# Altium PCB Coil_only_PCB1.PcbDoc
Units mm, origin at the board's own origin, x right, y up, seen from the top; angles counter-clockwise.
Board outline 57.7 x 52.7 mm, 4 copper layers (Top Layer, Mid-Layer 1, Mid-Layer 2, Bottom Layer), stack 1.341 mm thick; 4 components, 31 nets, 13 pads, 4 vias.
Unrouted connection lines stored in the file: 1.
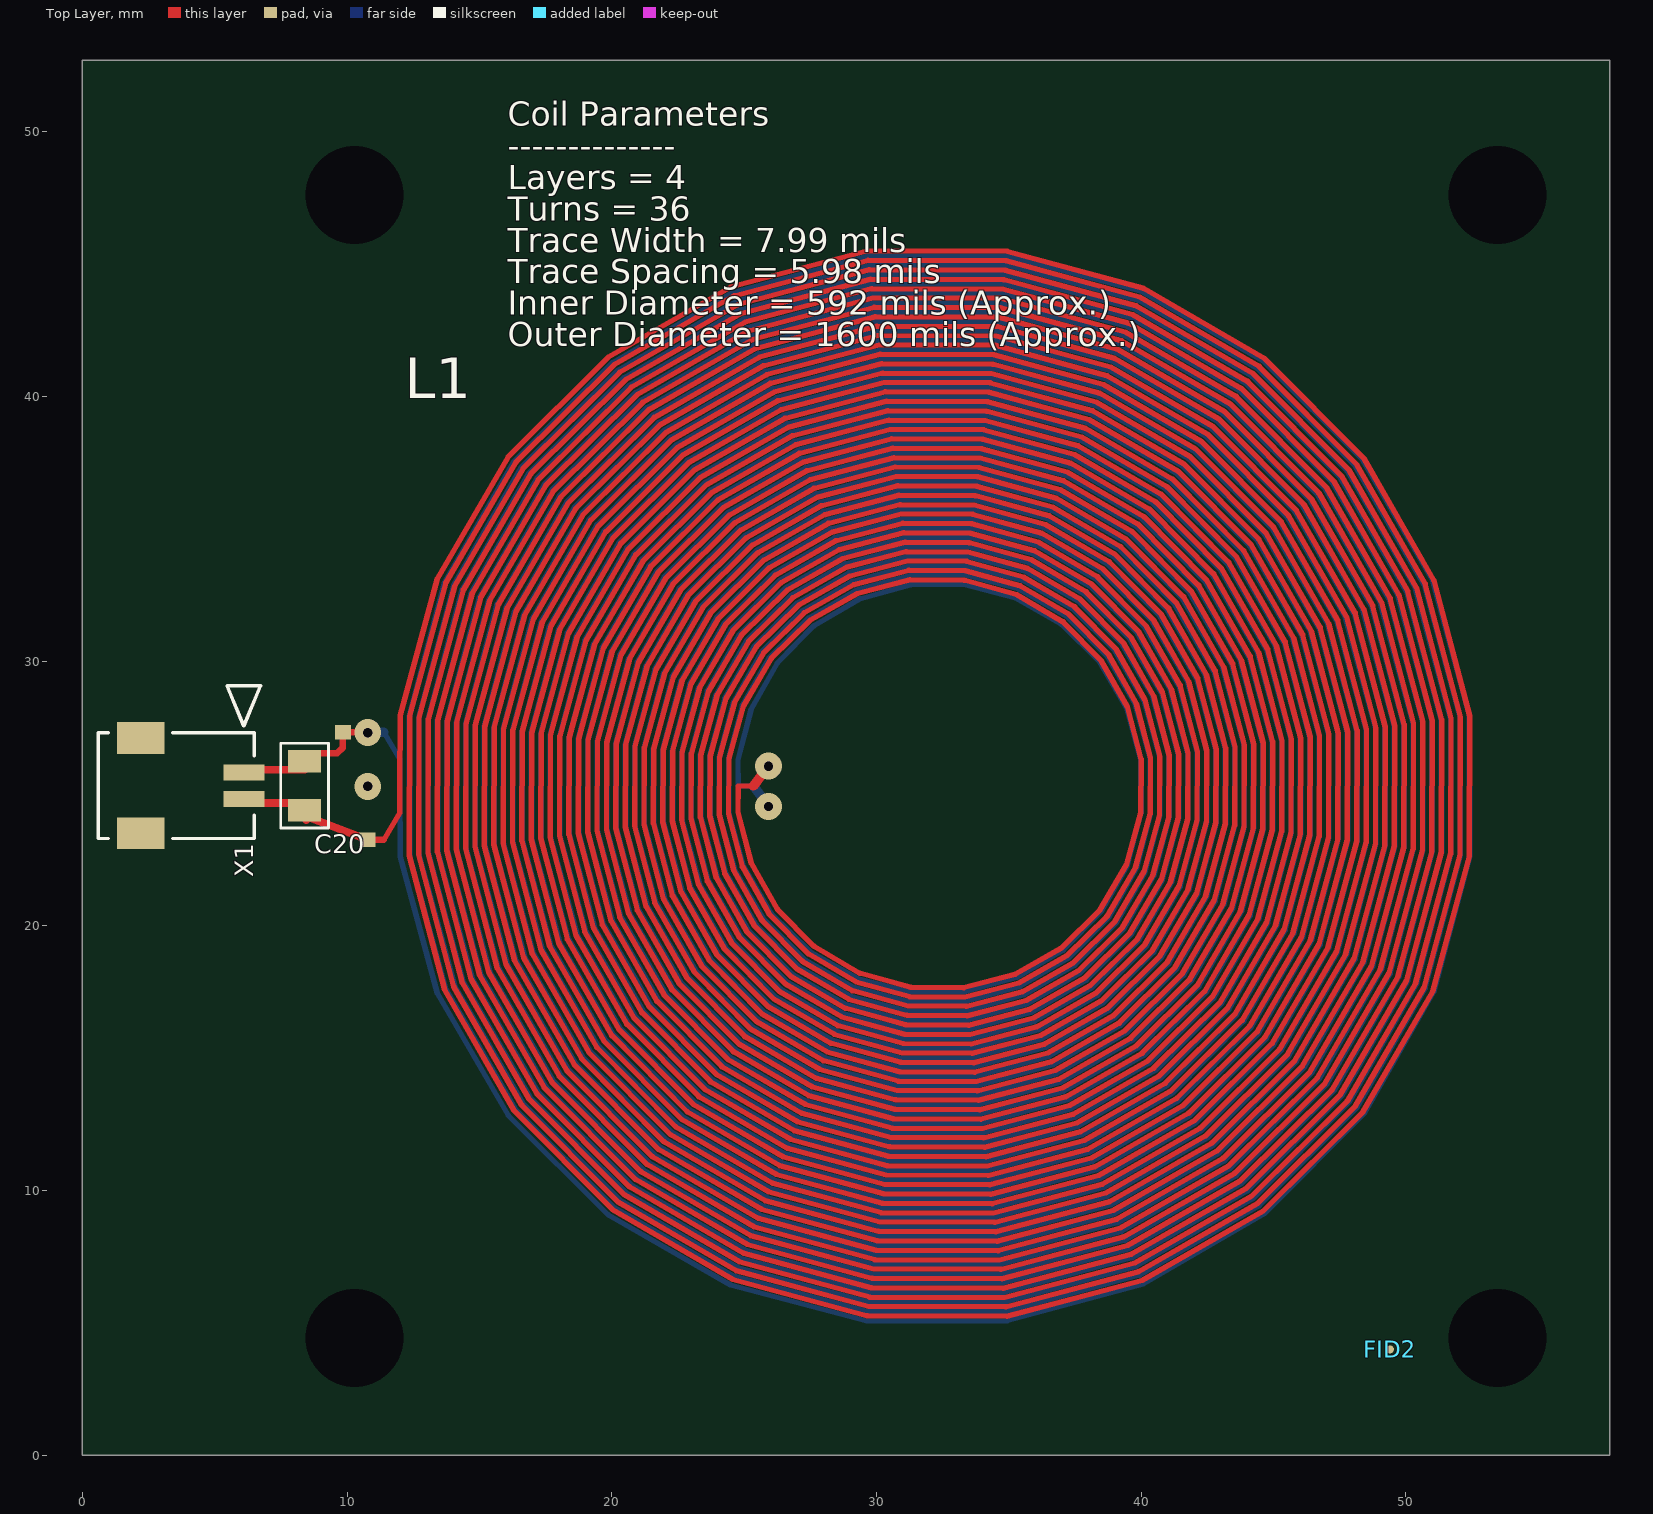
[diagram p0: Top Layer view]
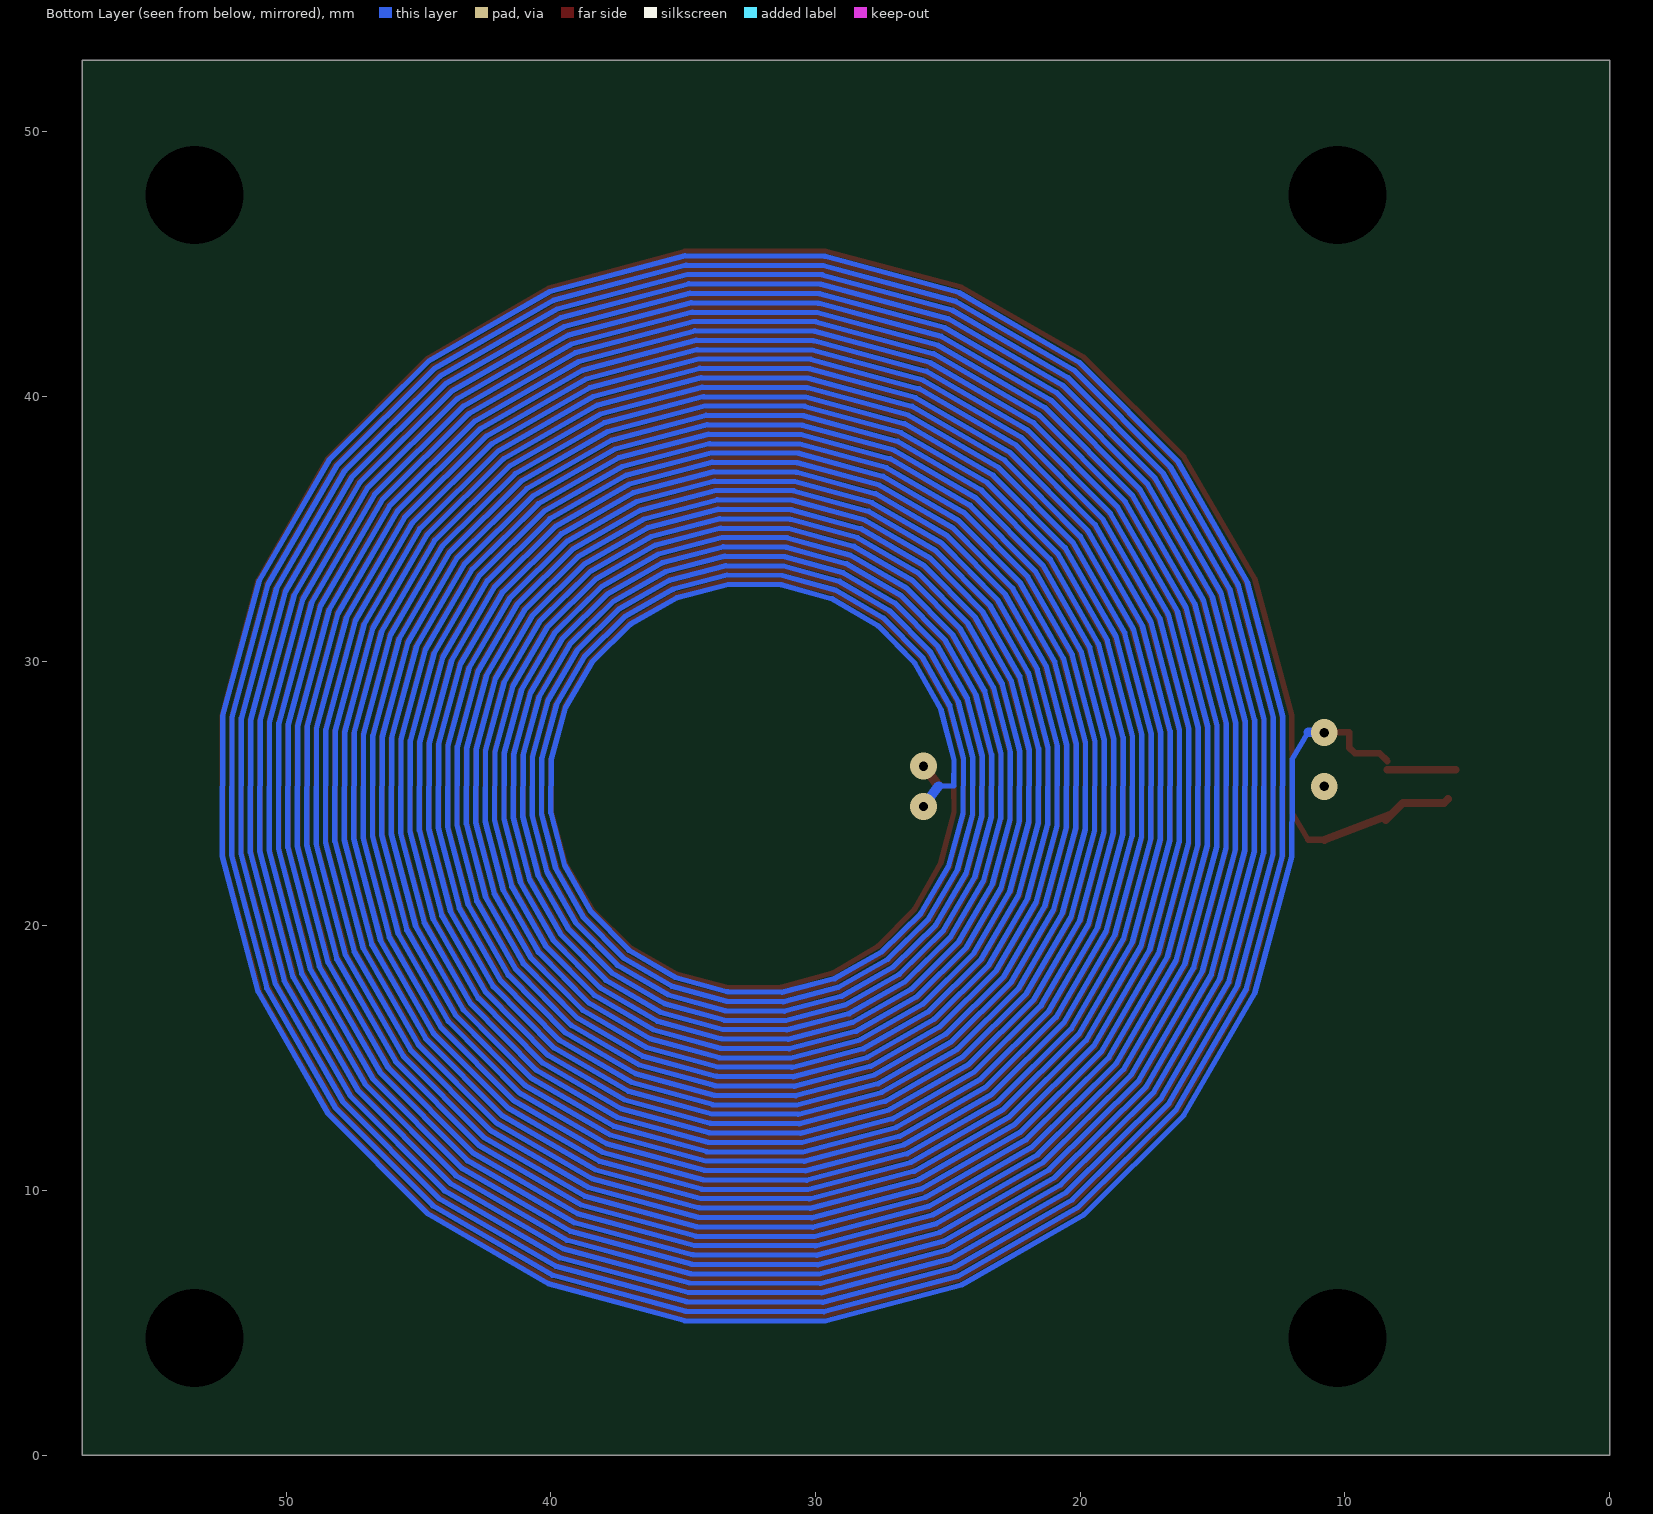
[diagram p1: Bottom Layer view, seen from below]
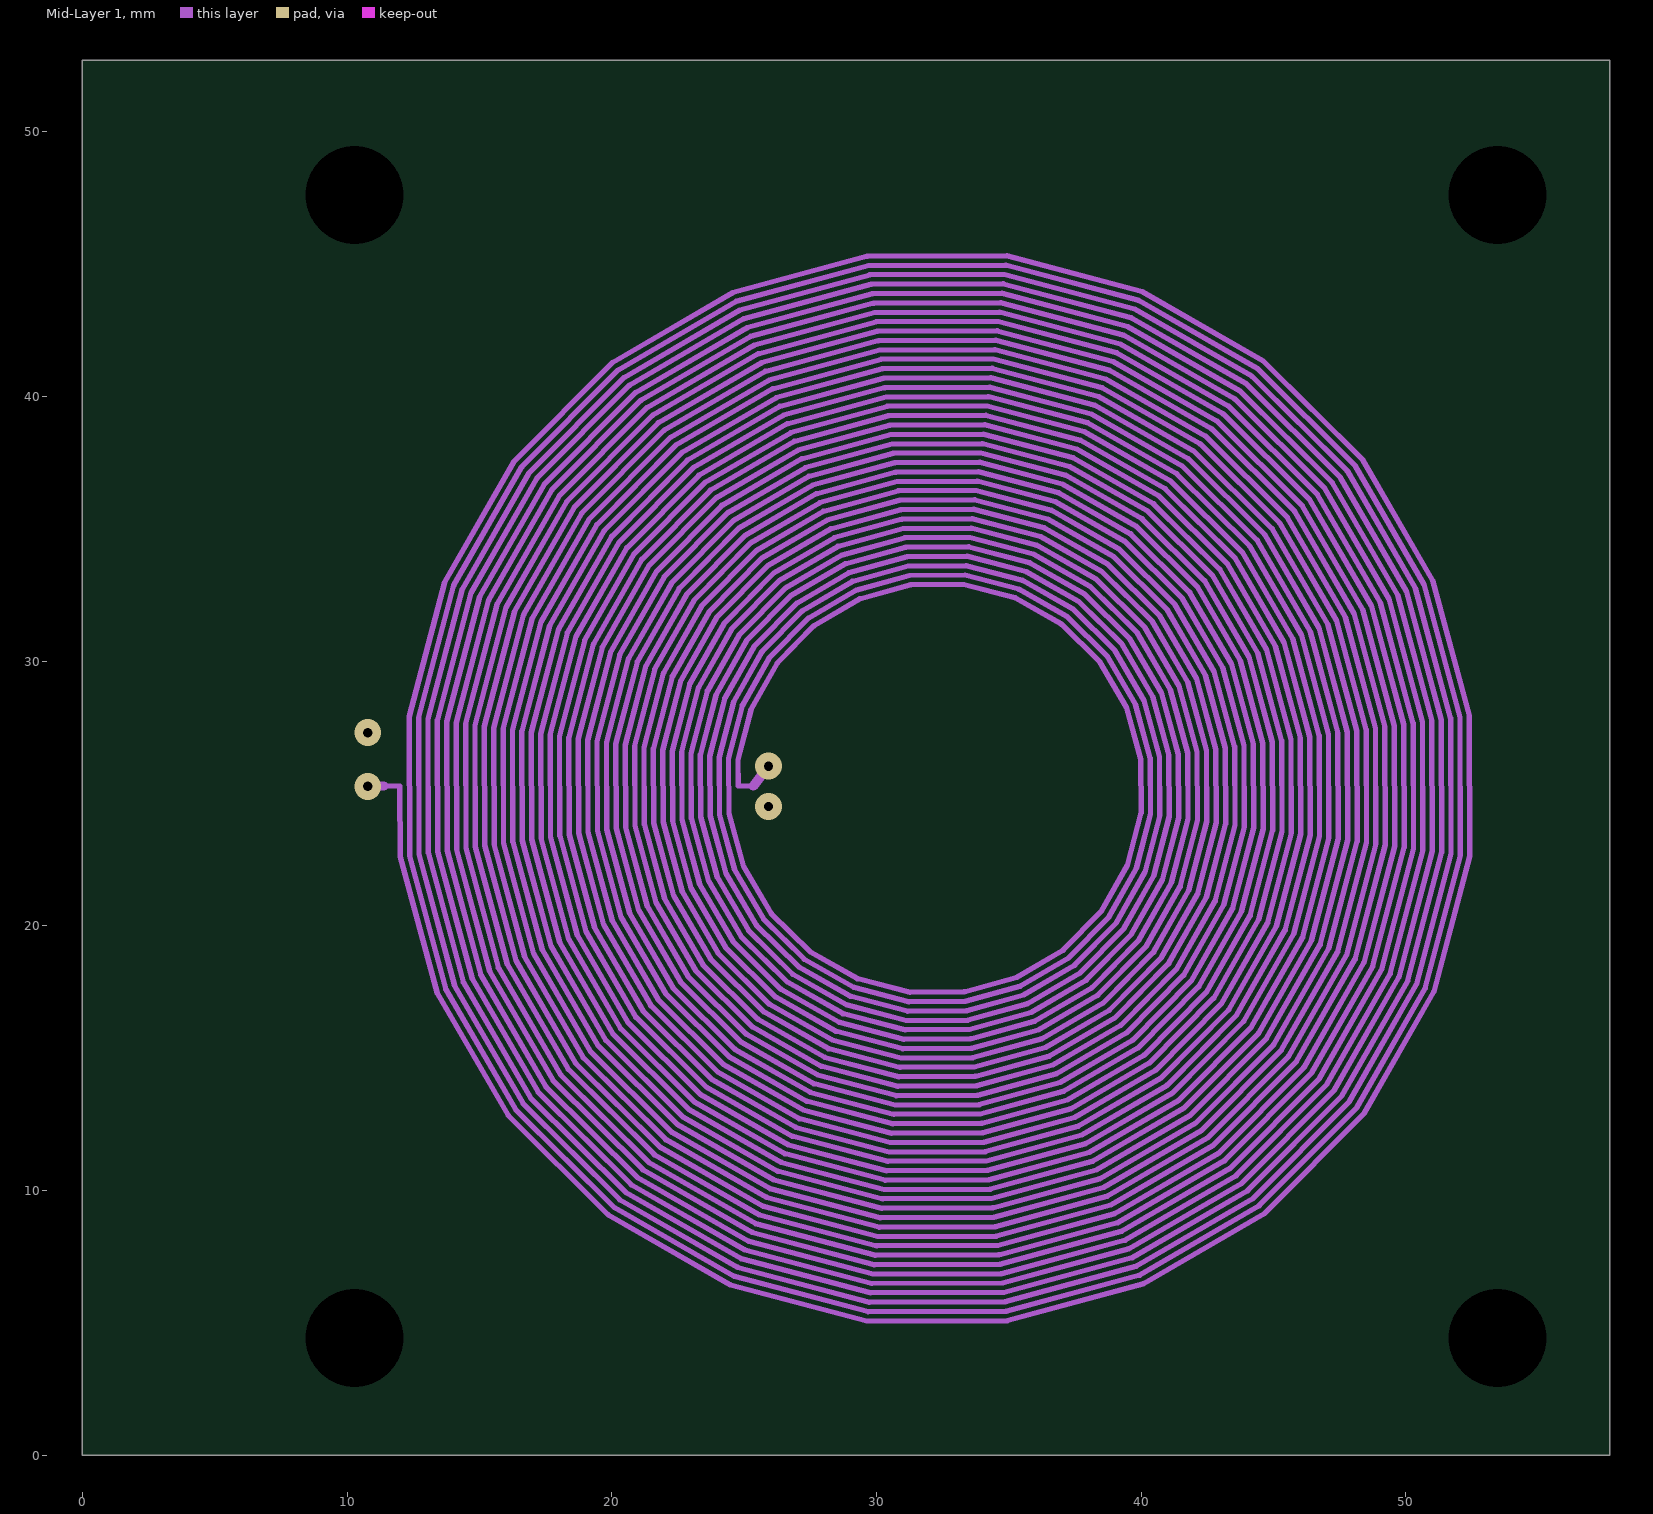
[diagram p2: Mid-Layer 1]
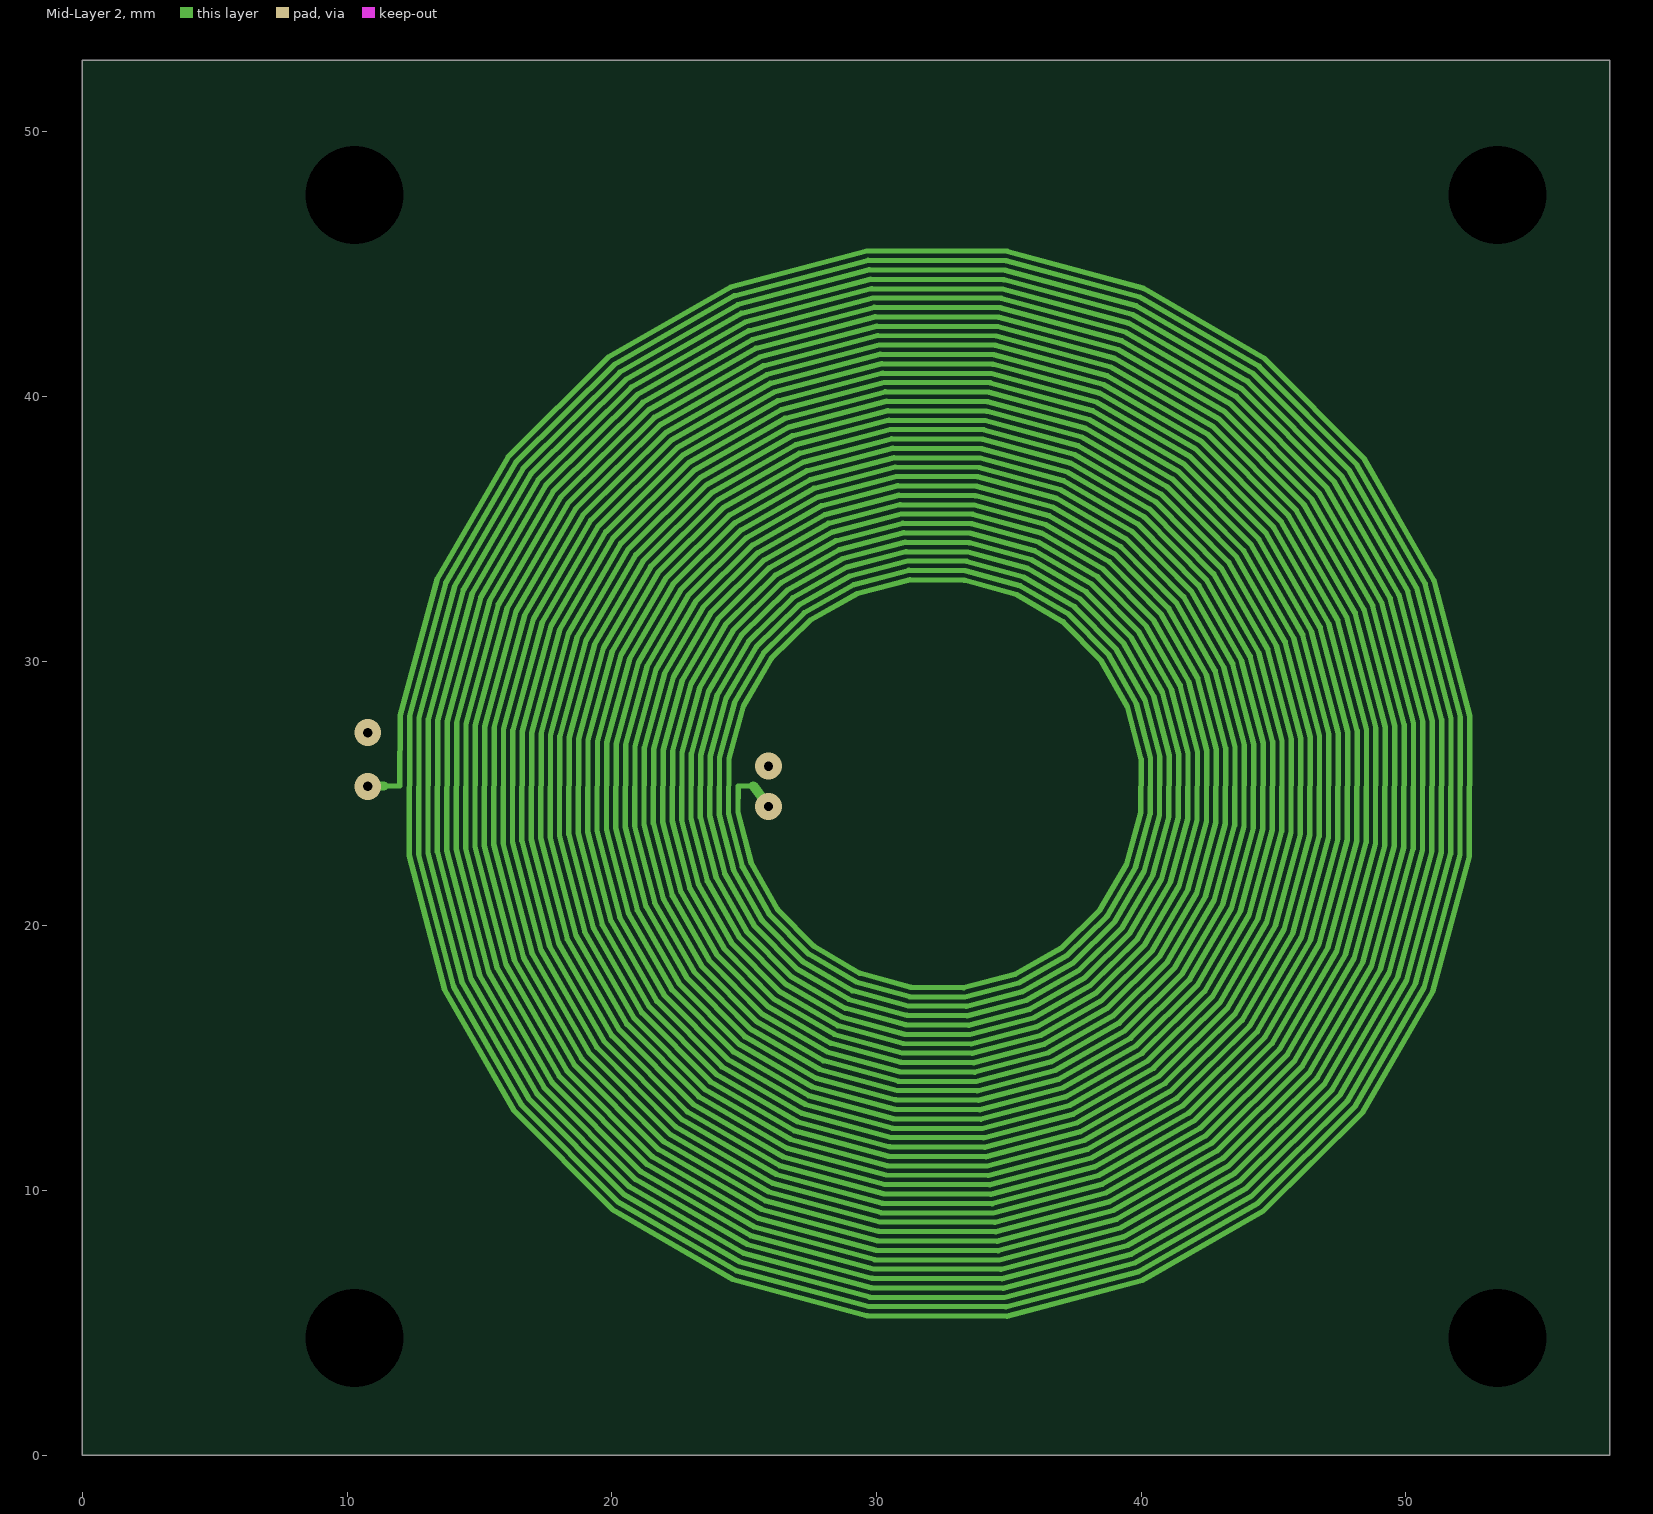
[diagram p3: Mid-Layer 2]

## Layer stack, top to bottom
Top Solder: solder mask 0.0102, Solder Resist, Dk 3.5
Top Layer: signal copper 0.035
Dielectric 1: dielectric 0.4, FR-4, Dk 4.8
Mid-Layer 1: signal copper 0.0356
Dielectric3: dielectric 0.4, FR-4, Dk 4.8
Mid-Layer 2: signal copper 0.0356
Dielectric2: dielectric 0.4, FR-4, Dk 4.8
Bottom Layer: signal copper 0.035
Bottom Solder: solder mask 0.0102, Solder Resist, Dk 3.5

## Board outline
0,0 57.7,0 57.7,52.7 0,52.7

## Design rules (kind name [scope] priority, off if disabled: settings)
BoardOutlineClearance [All] p1: gap=0.254 ignorepadtopadclearanceinfootprint=FALSE except(0: Arc-SplitContinuation Track-SplitContinuation SMDPad-SplitContinuation THPad-SplitContinuation Via-SplitContinuation Fill-SplitContinuation Poly-SplitContinuation Region-SplitContinuation Text-SplitContinuation; 0.4: Arc-OutlineEdge Track-OutlineEdge SMDPad-OutlineEdge THPad-OutlineEdge Via-OutlineEdge Fill-OutlineEdge Poly-OutlineEdge Region-OutlineEdge Text-OutlineEdge)
Clearance keepout [IsKeepOut] p1: gap=0 ignorepadtopadclearanceinfootprint=TRUE
Clearance [All] p2: gap=0.254 ignorepadtopadclearanceinfootprint=TRUE except(0: Arc-Fill Track-Fill SMDPad-Fill THPad-Fill Via-Fill Fill-Fill Text-Hole; 0.1: Arc-Track Track-Track; 0.127: Arc-Arc SMDPad-SMDPad; 0.2: Arc-SMDPad Track-SMDPad; 0.33: Arc-THPad Track-THPad SMDPad-THPad; 0.5: Arc-Hole Track-Hole THPad-THPad THPad-Hole Via-Hole)
HoleSize [All] p1: absolutevalues=TRUE maxlimit=5 minlimit=0.2 maxpercent=80.000 minpercent=20.000
MinimumAnnularRing [All] p1: minimumring=0.13
MinimumSolderMaskSliver [All] p1: minsoldermaskwidth=0.127
PolygonConnect [All] p1: connectstyle=Relief reliefconductorwidth=0.254 reliefentries=4 polygonreliefangle="90 Angle" airgapwidth=0.254
RoutingVias [All] p1: holewidth=0.3 width=0.7 viastyle="Through Hole" minholewidth=0.3 minwidth=0.7 maxholewidth=0.711 maxwidth=1.27
SilkToSilkClearance [All] p1: silktosilkclearance=0.15
SilkToSolderMaskClearance [IsPad] p1: minsilkscreentomaskgap=0.15 clearancetoexposedcopper=FALSE
SolderMaskExpansion [All] p1: expansion=0.038 istentingtop=FALSE
UnRoutedNet [All] p1: checkbadconnections=TRUE
Width [All] p1: maxlimit=10 minlimit=0.127 preferedwidth=0.3 bottomlayer_prefwidth=0.2 minimp=50.000000 maximp=50.000000 favimp=50.000000
25 further rules are at their usual default settings.

## Classes and differential pairs
component class Sheet1: FID2
component class Sense_LDC1612: C20 L1 X1

## Components (designator, comment, footprint, x,y, rotation, side; value= is the part's Value field where it differs from the comment)
C20 "510pF" CAP0805 8.4,25.3 r90 top value="510pF 50V"
FID2 "Fiducial" FID 49.4,4 r90 top
L1 "SenseCoil" COIL_4L 10.783,25.273 r0 top
X1 "2P Pico-Clasp" CON_2023960207 6.1,25.8 r270 top value=2023960207

## Footprints (in the part's own frame and the unit in brackets; to place one, negate y for a bottom-side part, rotate by r counter-clockwise, add the part's x,y. Pads: shape width x height; smd on the part's side, far side on the other; paste and mask are expansions set on the pad)
CAP0805 [mm]
  rect 0.85x1.25 smd: 1(-0.925,0) 2(0.925,0)
  silkscreen extent -1.6,-0.9 1.6,0.9, body extent -1,-0.63 1,0.63, height 1.35
COIL_4L [mil]
  rect 24x22 smd: 1(-0.34,-79.53) 2(-37.08,80.47)
  Top Layer drawing of 873 lines, arcs and shapes, not listed
  Mid-Layer 1 drawing of 869 lines, arcs and shapes, not listed
  Mid-Layer 2 drawing of 869 lines, arcs and shapes, not listed
  Bottom Layer drawing of 870 lines, arcs and shapes, not listed
CON_2023960207 [mm]
  rect 0.6x1.55 smd paste+0 mask+0.076: 1(0,0) 2(1,0)
  rect 1.2x1.8 smd paste+0 mask+0.076: 3(-1.3,-3.9) 4(2.3,-3.9)
  silkscreen extent -3.28,-5.5 2.5,0.63, body extent -1.5,-5.48 2.5,0.43, height 3.2
FID [mm]
  round 0.3 smd paste-1 mask+0.5: 2(0,0)

## Part data
C20: library part CC0805JRNPO9BN511, "0805 510 pF 50 V ±5 % Tolerance NP0 SMT Multilayer Ceramic Capacitor", Case Code (Imperial)=0805, Case Code (Metric)=2012, Dielectric=NP0, LCSC Part#=C309486, Manufacturer=Yageo, Max Operating Temperature=125°C, Min Operating Temperature=-55°C, Supplier Part Number=311-4240-1-ND, Tolerance=5%, Voltage Rating=50V, Case/Package=0805, Category="Ceramic Capacitors", ComponentLink1Description=http://www.mouser.com/ds/2/447/Yageo_UPY-GP_NP0_16V-to-50V_9-358835.pdf?src-supplier=Mouser, ComponentLink1URL=http://www.mouser.com/ds/2/447/Yageo_UPY-GP_NP0_16V-to-50V_9-358835.pdf?src-supplier=Mouser, ComponentLink2Description=https://www.yageo.com/upload/media/product/productsearch/datasheet/mlcc/UPY-GP_NP0_16V-to-50V_18.pdf?src-supplier=Digi-Key, ComponentLink2URL=https://www.yageo.com/upload/media/product/productsearch/datasheet/mlcc/UPY-GP_NP0_16V-to-50V_18.pdf?src-supplier=Digi-Key, ComponentLink3Description=http://www.yageo.com/documents/recent/UPY-GP_NP0_16V-to-50V_16.pdf?src-supplier=Digi-Key, ComponentLink3URL=http://www.yageo.com/documents/recent/UPY-GP_NP0_16V-to-50V_16.pdf?src-supplier=Digi-Key, ComponentLink4Description=http://www.yageo.com/exep/pages/download/literatures/ProductSelectionGuide%202014_Final_2.pdf?src-supplier=Digi-Key, ComponentLink4URL=http://www.yageo.com/exep/pages/download/literatures/ProductSelectionGuide%202014_Final_2.pdf?src-supplier=Digi-Key, ComponentLink5Description=http://www.yageo.com/documents/recent/UPY-GP_NP0_16V-to-50V_9.pdf?src-supplier=Future+Electronics, ComponentLink5URL=http://www.yageo.com/documents/recent/UPY-GP_NP0_16V-to-50V_9.pdf?src-supplier=Future+Electronics, ComponentLink6Description=https://datasheet.octopart.com/CC0805JRNPO9BN511-Yageo-datasheet-151948684.pdf?src-supplier=Newark, ComponentLink6URL=https://datasheet.octopart.com/CC0805JRNPO9BN511-Yageo-datasheet-151948684.pdf?src-supplier=Newark, Lead Free="Lead Free", Length=0.079inch, Manufacturer Part Number=CC0805JRNPO9BN511, Mounting Technology="Surface Mount", Packaging="Tape and Reel", Pricing="1=0.18, 10=0.119, 50=0.071, 100=0.0559, 500=0.04124, 1000=0.03415 (USD)", RoHS=Yes, Series=CC, Stock=4065, Supplier=Digi-Key, Termination=SMD/SMT, Thickness=0.028inch, Voltage Rating (DC)=50V, Weight=0.000194oz, Width=0.049inch
X1: library part 202396-0207, "Conn Shrouded Header (4 Sides) HDR 2 POS 1mm Solder RA Side Entry SMD Pico-Clasp™ T/R", Flammability Rating="UL94 V-0", Insulation Color=Natural, LCSC Part#=C585325, Manufacturer=Molex, Max Operating Temperature=105°C, Min Operating Temperature=-40°C, Supplier Part Number=WM26783CT-ND, Category="Headers and Wire Housings", ComponentLink1Description=http://datasheet.octopart.com/2023960207-Molex-datasheet-147952241.pdf?src-supplier=Digi-Key, ComponentLink1URL=http://datasheet.octopart.com/2023960207-Molex-datasheet-147952241.pdf?src-supplier=Digi-Key, ComponentLink2Description=https://www.molex.com/pdm_docs/sd/2023960207_sd.pdf?src-supplier=Digi-Key, ComponentLink2URL=https://www.molex.com/pdm_docs/sd/2023960207_sd.pdf?src-supplier=Digi-Key, ComponentLink3Description=http://datasheet.octopart.com/2023960207-Molex-datasheet-147952241.pdf?src-supplier=Newark, ComponentLink3URL=http://datasheet.octopart.com/2023960207-Molex-datasheet-147952241.pdf?src-supplier=Newark, ComponentLink4Description=http://datasheet.octopart.com/2023960207-Molex-datasheet-147952241.pdf?src-supplier=Farnell, ComponentLink4URL=http://datasheet.octopart.com/2023960207-Molex-datasheet-147952241.pdf?src-supplier=Farnell, ComponentLink5Description=http://datasheet.octopart.com/2023960207-Molex-datasheet-147952241.pdf?src-supplier=Avnet, ComponentLink5URL=http://datasheet.octopart.com/2023960207-Molex-datasheet-147952241.pdf?src-supplier=Avnet, ComponentLink6Description=http://datasheet.octopart.com/2023960207-Molex-datasheet-147952241.pdf?src-supplier=Arrow+Electronics, ComponentLink6URL=http://datasheet.octopart.com/2023960207-Molex-datasheet-147952241.pdf?src-supplier=Arrow+Electronics, ComponentLink7Description=http://datasheet.octopart.com/2023960207-Molex-datasheet-147952241.pdf?src-supplier=TTI, ComponentLink7URL=http://datasheet.octopart.com/2023960207-Molex-datasheet-147952241.pdf?src-supplier=TTI, ComponentLink8Description=http://datasheet.octopart.com/2023960207-Molex-datasheet-147952241.pdf?src-supplier=Electro+Sonic, ComponentLink8URL=http://datasheet.octopart.com/2023960207-Molex-datasheet-147952241.pdf?src-supplier=Electro+Sonic, ComponentLink9Description=https://datasheet.octopart.com/202396-0207-Molex-datasheet-134623761.pdf?src-supplier=TME, ComponentLink9URL=https://datasheet.octopart.com/202396-0207-Molex-datasheet-134623761.pdf?src-supplier=TME, Connector Type=Header, Contact Finish - Mating=GOLD, Contact Material=Bronze, Contact Shape=Square, Contact Type="Male Pin", Fastening Type=Latch, Insulation Material=Nylon, Manufacturer Part Number=202396-0207, Mounting Technology="Surface Mount", Number of Positions=2, Number of Rows=1, Packaging="Tape and Reel", Pricing="1=0.97, 10=0.804, 100=0.6698 (USD)", RoHS=No, Series="Pico-Clasp 202396", Stock=6710, Supplier=Digi-Key, Termination=Solder

## Free pads (board coordinates)
  round 0 hole 3.7 unplated paste-5: MTH1(10.275,4.43) MTH1(10.275,47.61) MTH1(53.455,4.43) MTH1(53.455,47.61)

## Via types
v1: diameter 1.016/1.016/1.016/1.016 (per signal layer), hole 0.356, Top Layer to Bottom Layer, 4 vias

## Nets (pads, with @x,y where several pads share a name; then routed paths per layer and width w, separated by ;. In a path a pad name is that pad's centre, name@x,y a point inside that pad or via, vN(x,y) a via of type N, cw(c..) or ccw(c..) an arc to the next point about the centre after c; other vN are vias at no path point)
GND: 
NetC3_1: C20.1 X1.2 | length 2.7
  Top Layer w0.3: X1.2 6.25,24.65 7.809,24.65 C20.1@8.459,24
NetC4_1: C20.2 L1.1 X1.1 | length 4.8
  Top Layer w0.254: C20.2 8.698,26.523 9.627,26.523 9.841,26.737 9.841,27.317
  Top Layer w0.3: X1.1@5.827,25.9 C20.2@8.4,25.9
  other v1: 25.921,26.035
NetC6_2: 
NetC7_2: 
NetC12_1: 
NetC13_1: 
NetC15_1: 
NetC17_1: 
NetC18_1: 
NetCR1_2: 
NetCR2_2: 
NetJ1_2: 
NetJ1_3: 
NetQ1_3: 
NetR1_2: 
NetR2_2: 
NetR3_1: 
NetR4_1: 
NetR5_1: 
NetR6_1: 
NetR7_2: 
NetSW1_2: 
NetSW1_5: 
NetTP2_1: 
NetTP9_1: 
NetTP20_1: 
NetTP26_1: 
VDD: 
VDD_PROG: 
VDD_uC: 
pads on no net: FID2.2 L1.2 X1.3 X1.4
copper on no net: | length 2.6
  Top Layer w0.3: 8.3,24.2 10.774,23.253
  other v1: 25.921,24.511 10.783,25.273 10.783,27.305

## Silkscreen, mask and mechanical layers (free items; w line width, h text height)
Top Overlay:
  text "Coil Parameters" at 16.072,50.225 h0.91
  text "--------------" at 16.072,49.032 h0.91
  text "Layers = 4" at 16.072,47.838 h0.91
  text "Turns = 36" at 16.072,46.644 h0.91
  text "Trace Width = 7.99 mils" at 16.072,45.45 h0.91
  text "Trace Spacing = 5.98 mils" at 16.072,44.282 h0.91
  text "Inner Diameter = 592 mils (Approx.)" at 16.072,43.088 h0.91
  text "Outer Diameter = 1600 mils (Approx.)" at 16.072,41.894 h0.91
FabNotes:
  drawing of 419 lines, arcs and shapes, not listed
  text "Layer" at -28.731,187.351 h1.52
  text "Name" at -18.32,187.351 h1.52
  text "Material" at 5.296,187.351 h1.52
  text "Thickness" at 27.134,187.351 h1.52
  text "Constant" at 43.64,187.351 h1.52
  text "Board Layer Stack" at 58.114,187.351 h1.52
  text "Top Overlay" at -18.32,184.303 h1.52
  text "Top Solder" at -18.32,181.255 h1.52
  text "Solder Resist" at 5.296,181.255 h1.52
  text "0.40mil" at 27.134,181.255 h1.52
  text "3.5" at 43.64,181.255 h1.52
  text "1" at -28.731,178.207 h1.52
  text "Top Layer" at -18.32,178.207 h1.52
  text "1.38mil" at 27.134,178.207 h1.52
  text "Dielectric 1" at -18.32,175.159 h1.52
  text "FR-4" at 5.296,175.159 h1.52
  text "15.75mil" at 27.134,175.159 h1.52
  text "4.8" at 43.64,175.159 h1.52
  text "2" at -28.731,172.111 h1.52
  text "Mid-Layer 1" at -18.32,172.111 h1.52
  text "1.40mil" at 27.134,172.111 h1.52
  text "Dielectric3" at -18.32,169.063 h1.52
  text "FR-4" at 5.296,169.063 h1.52
  text "15.75mil" at 27.134,169.063 h1.52
  text "4.8" at 43.64,169.063 h1.52
  text "3" at -28.731,166.015 h1.52
  text "Mid-Layer 2" at -18.32,166.015 h1.52
  text "1.40mil" at 27.134,166.015 h1.52
  text "Dielectric2" at -18.32,162.967 h1.52
  text "FR-4" at 5.296,162.967 h1.52
  text "15.75mil" at 27.134,162.967 h1.52
  text "4.8" at 43.64,162.967 h1.52
  text "4" at -28.731,159.919 h1.52
  text "Bottom Layer" at -18.32,159.919 h1.52
  text "1.38mil" at 27.134,159.919 h1.52
  text "Bottom Solder" at -18.32,156.871 h1.52
  text "Solder Resist" at 5.296,156.871 h1.52
  text "0.40mil" at 27.134,156.871 h1.52
  text "3.5" at 43.64,156.871 h1.52
  text "Bottom Overlay" at -18.32,153.823 h1.52
Drill Drawing:
  lines w0.254: -28.991,63.667 -28.567,63.667 -28.144,63.244 -27.721,63.667 -27.297,63.667 -27.721,64.09 -27.297,64.513 -27.721,64.513 -28.144,64.937 -28.567,64.513 -28.991,64.513 -28.567,64.09 -28.991,63.667 ; -28.991,67.054 -27.297,67.054 -27.297,68.747 -28.991,68.747 -28.991,67.054
  lines w0.381: -30.509,62.101 235.964,62.101 ; -30.509,69.721 235.964,69.721 ; -16.517,58.291 -16.517,73.531 ; -4.328,58.291 -4.328,73.531 ; 24.873,58.291 24.873,73.531 ; 37.722,58.291 37.722,73.531 ; 56.361,58.291 56.361,73.531 ; 94.45,58.291 94.45,73.531 ; 109.432,58.291 109.432,73.531 ; 128.375,58.291 128.375,73.531 ; 145.388,58.291 145.388,73.531 ; 167.074,58.291 167.074,73.531 ; 200.948,58.291 200.948,73.531 ; -30.509,58.291 235.964,58.291 235.964,73.531 -30.509,73.531 -30.509,58.291
  text "Symbol" at -28.223,70.864 h1.83
  text "Count" at -15.374,70.864 h1.83
  text "Hole Size" at -3.185,70.864 h1.83
  text "Plated" at 26.016,70.864 h1.83
  text "Hole Type" at 38.865,70.864 h1.83
  text "Drill Layer Pair" at 57.504,70.864 h1.83
  text "Via/Pad" at 95.593,70.864 h1.83
  text "Pad Shape" at 110.575,70.864 h1.83
  text "Template" at 129.518,70.864 h1.83
  text "Description" at 146.531,70.864 h1.83
  text "Hole Tolerance (+)" at 168.217,70.864 h1.83
  text "Hole Tolerance (-)" at 202.091,70.864 h1.83
  text "4" at -15.374,67.054 h1.52
  text "0.356mm (14.00mil)" at -3.185,67.054 h1.52
  text "PTH" at 26.016,67.054 h1.52
  text "Round" at 38.865,67.054 h1.52
  text "Top Layer - Bottom Layer" at 57.504,67.054 h1.52
  text "Via" at 95.593,67.054 h1.52
  text "Rounded" at 110.575,67.054 h1.52
  text "v102h36" at 129.518,67.054 h1.52
  text "4" at -15.374,63.244 h1.52
  text "3.700mm (145.67mil)" at -3.185,63.244 h1.52
  text "NPTH" at 26.016,63.244 h1.52
  text "Round" at 38.865,63.244 h1.52
  text "Top Layer - Bottom Layer" at 57.504,63.244 h1.52
  text "Pad" at 95.593,63.244 h1.52
  text "Rounded" at 110.575,63.244 h1.52
  text "c0hn370p-1" at 129.518,63.244 h1.52
  text "8 Total" at -15.374,59.434 h1.52